# Altium PCB PCB_ACDC底板 copy copy_2023-12-22.pcbdoc
Units mm, origin at the board's own origin, x right, y up, seen from the top; angles counter-clockwise.
Board outline 87.4 x 68.92 mm, 2 copper layers (Top Layer, Bottom Layer); 41 components, 31 nets, 129 pads, 0 vias.
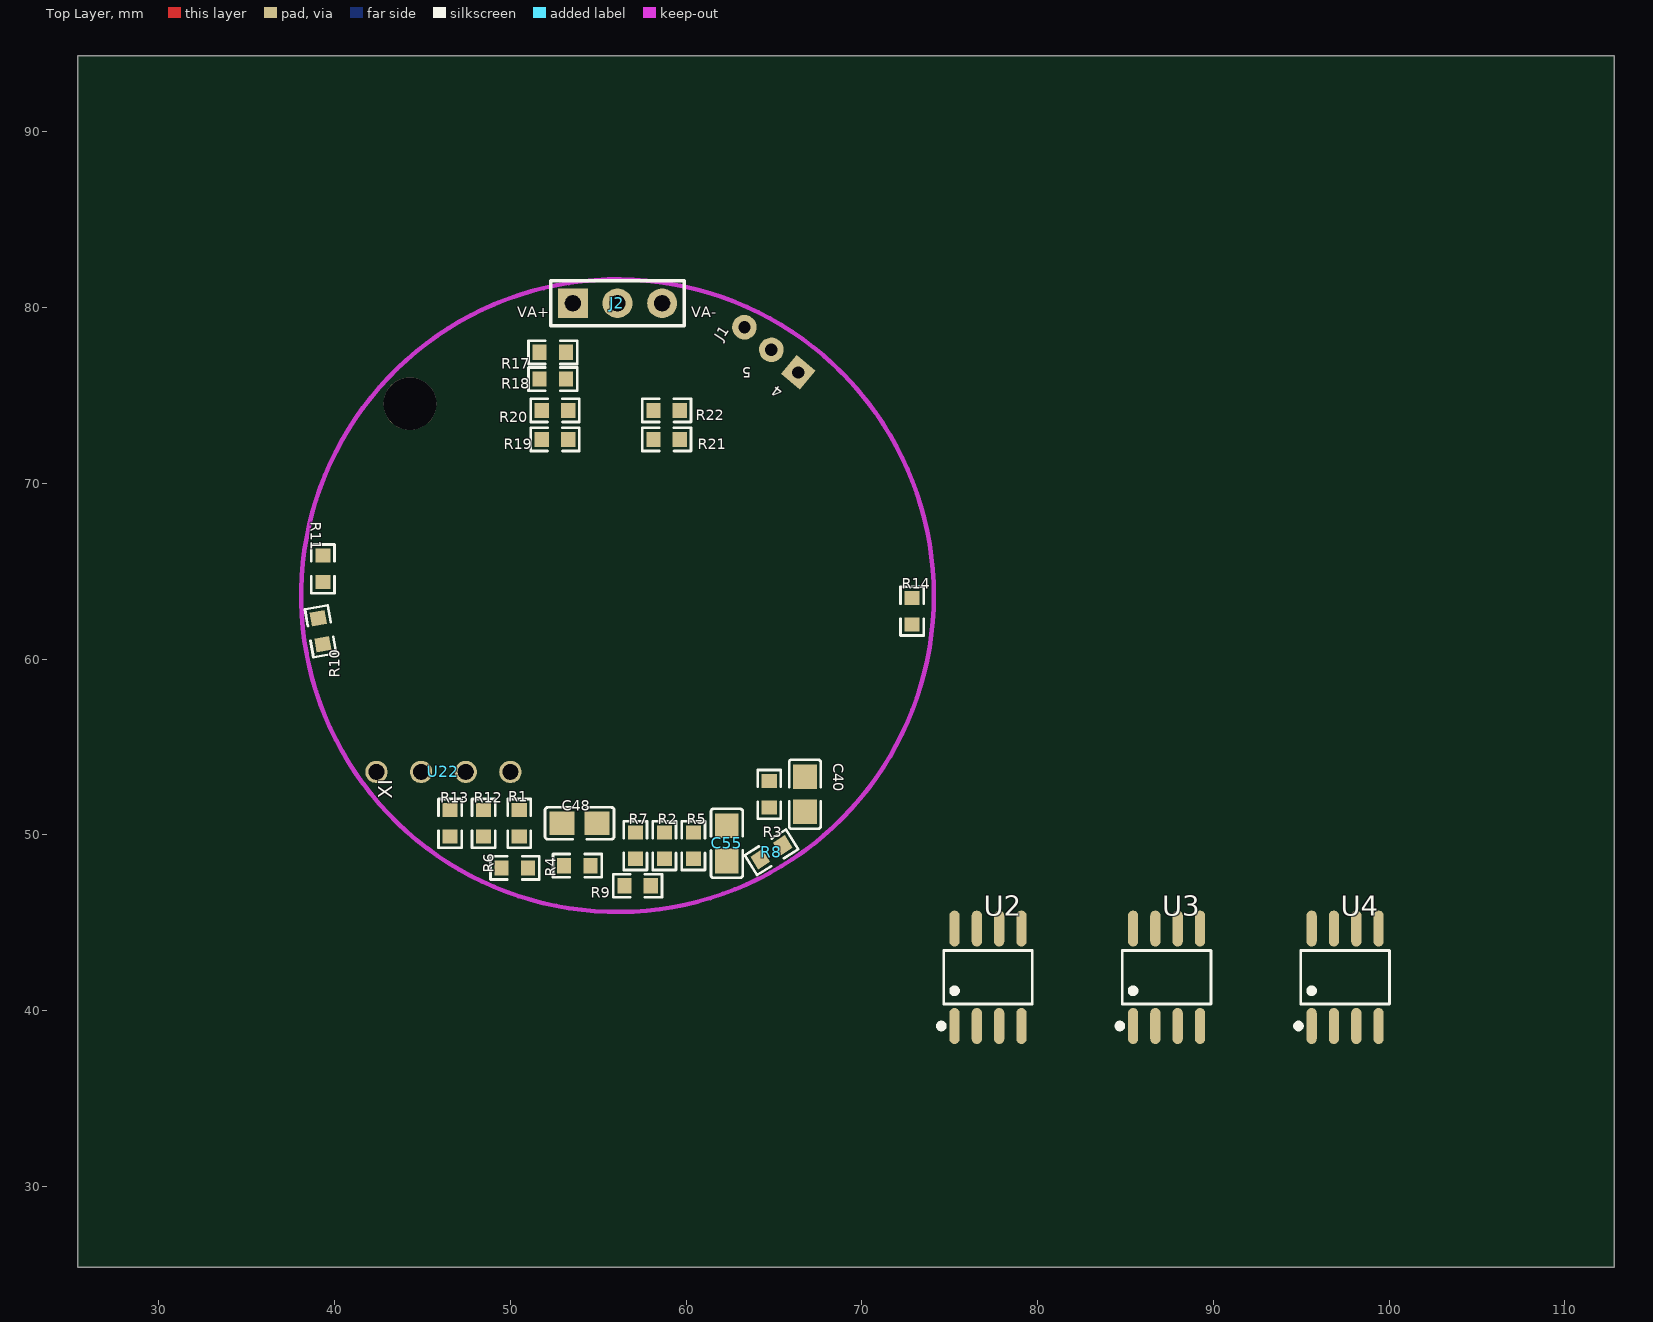
[diagram p0: Top Layer view]
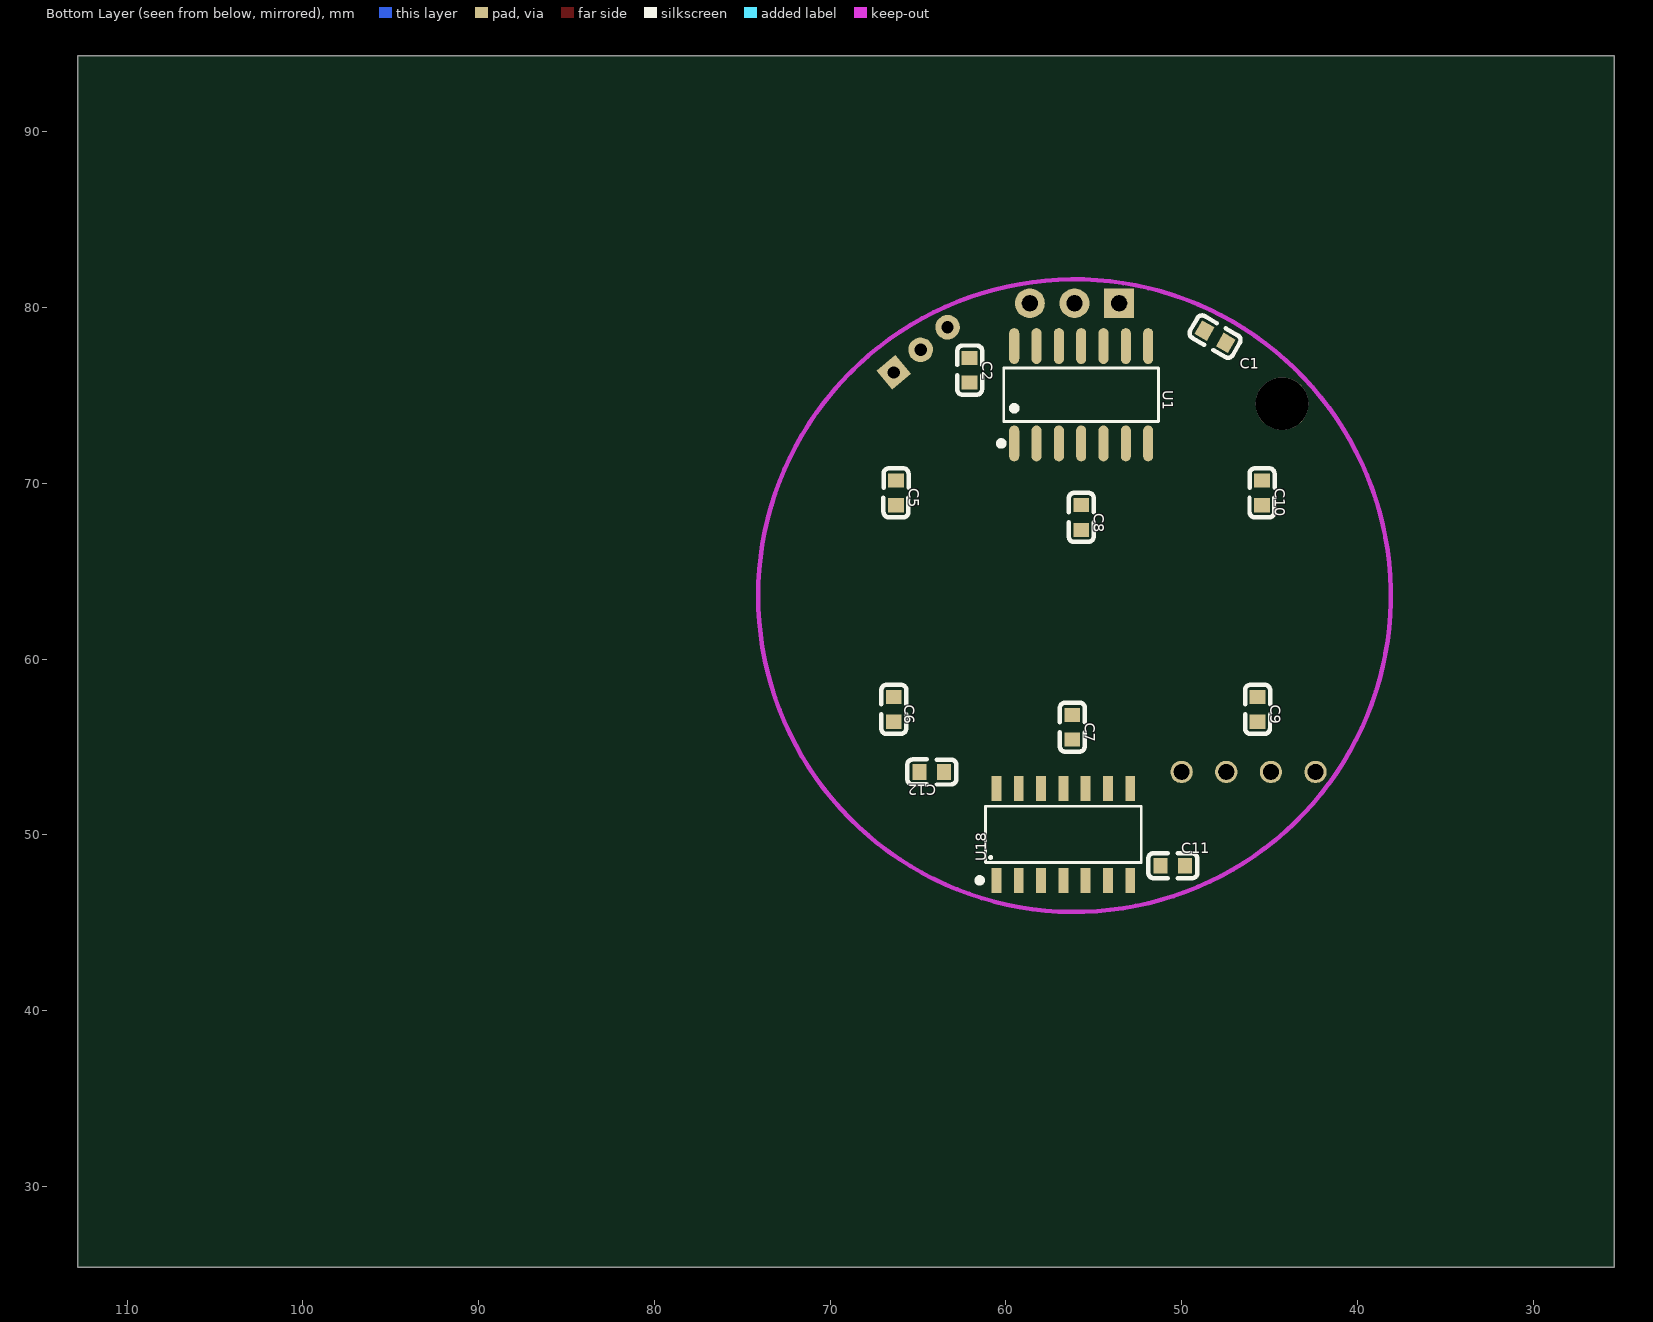
[diagram p1: Bottom Layer view, seen from below]

## Layer stack, top to bottom
Top Layer: signal copper (thickness not stored)
Dielectric: dielectric 0.32, FR-4, Dk 4.8
Bottom Layer: signal copper (thickness not stored)

## Board outline
112.804,25.4 25.4,25.4 25.4,94.319 112.804,94.319

## Components (designator, comment, footprint, x,y, rotation, side; value= is the part's Value field where it differs from the comment)
C1 "0.1u" C0603 48.099,78.344 r30 bottom
C2 "0.1u" C0603 62.069,76.439 r90 bottom
C5 "0.1u" C0603 66.26,69.454 r90 bottom
C6 "0.1u" C0603 66.387,57.135 r90 bottom
C7 "0.1u" C0603 56.227,56.119 r90 bottom
C8 "0.1u" C0603 55.719,68.057 r90 bottom
C9 "0.1u" C0603 45.686,57.135 r90 bottom
C10 "0.1u" C0603 45.432,69.454 r90 bottom
C11 "0.1u" C0603 50.512,48.245 r180 bottom
C12 "0.1u" C0603 64.228,53.579 r180 bottom
C40 "15nf" C0805 66.768,52.309 r270 top
C48 "15nf" C0805 53.941,50.658 r180 top
C55 "15nf" C0805 62.323,49.515 r90 top
J1 "排针2.0*3p" 排针2.0*3P米有 66.387,76.312 r50 top
J2 "2.54 3p 两板子之间过渡用" XH2.54-3P 56.1,80.249 r0 top
R1 "75k" R0603 50.512,50.658 r90 top
R2 "62k" R0603 58.767,49.388 r90 top
R3 "360k" R0603 64.736,52.309 r270 top
R4 "360k" R0603 53.814,48.245 r180 top
R5 "360k" R0603 60.418,49.388 r90 top
R6 "75k" R0603 50.258,48.118 r0 top
R7 "62k" R0603 57.116,49.388 r90 top
R8 "75k" R0603 64.863,49.007 r212 top
R9 "62k" R0603 57.243,47.102 r0 top
R10 "1k" R0603 39.209,61.58 r100 top
R11 "10k" R0603 39.336,65.136 r270 top
R12 "4.99k" R0603 48.48,50.658 r270 top
R13 "4.99k" R0603 46.575,50.658 r270 top
R14 "4.99k" R0603 72.864,62.723 r270 top
R17 "3k" R0603 52.417,77.455 r180 top
R18 "1k" R0603 52.417,75.931 r0 top
R19 "3k" R0603 52.544,72.502 r180 top
R20 "1k" R0603 52.544,74.153 r0 top
R21 "3k" R0603 58.894,72.502 r0 top
R22 "1k" R0603 58.894,74.153 r180 top
U1 "OPA4182IDR" SOIC-14_L8.7-W3.9-P1.27-LS6.0-BL 55.719,75.042 r0 bottom
U2 "AD633ARZ" SOIC-8_L4.9-W3.9-P1.27-LS6.0-BL 77.182,41.895 r0 top
U3 "AD633ARZ" SOIC-8_L4.9-W3.9-P1.27-LS6.0-BL 87.342,41.895 r0 top
U4 "AD633ARZ" SOIC-8_L4.9-W3.9-P1.27-LS6.0-BL 97.502,41.895 r0 top
U18 "TL084ACDT COPY" SOP-14_L8.7-W3.9-P1.27-LS6.0-BL 56.735,50.023 r0 bottom
U22 "4P 2.54排针" 2.54-4P 46.194,53.579 r0 top

## Footprints (in the part's own frame and the unit in brackets; to place one, negate y for a bottom-side part, rotate by r counter-clockwise, add the part's x,y. Pads: shape width x height; smd on the part's side, far side on the other; paste and mask are expansions set on the pad)
2.54-4P [mil]
  round 50 hole 35 slot 35.2 at 0 deg paste+0 mask+2: 1(-150,0) 2(-50,0) 3(50,0) 4(150,0)
C0603 [mm]
  rect 0.8x0.9 smd paste+0 mask+0.051: 1(0.7,0) 2(-0.7,0)
  silkscreen extent -1.39,-0.72 1.41,0.71
C0805 [mm]
  rect 1.41x1.35 smd paste-100 mask+0.051: 1(-1,0) 2(1,0)
  silkscreen extent -1.96,-0.9 1.96,0.9
R0603 [mm]
  rect 0.806x0.864 smd paste-100 mask+0.051: 1(-0.753,0) 2(0.753,0)
  silkscreen extent -1.39,-0.66 1.39,0.66
SOIC-8_L4.9-W3.9-P1.27-LS6.0-BL [mm]
  oval 0.588x2.045 smd paste+0 mask+0.051: 1(-1.905,-2.773) 2(-0.635,-2.773) 3(0.635,-2.773) 4(1.905,-2.773) 5(1.905,2.773) 6(0.635,2.773) 7(-0.635,2.773) 8(-1.905,2.773)
  silkscreen extent -2.8,-2.92 2.53,1.52
SOIC-14_L8.7-W3.9-P1.27-LS6.0-BL [mm]
  oval 0.574x2.038 smd paste+0 mask+0.051: 1(3.81,2.769) 2(2.54,2.769) 3(1.27,2.769) 4(0,2.769) 5(-1.27,2.769) 6(-2.54,2.769) 7(-3.81,2.769) 8(-3.81,-2.769) 9(-2.54,-2.769) 10(-1.27,-2.769) 11(0,-2.769) 12(1.27,-2.769) 13(2.54,-2.769) 14(3.81,-2.769)
  silkscreen extent -4.4,-1.52 4.7,2.92
SOP-14_L8.7-W3.9-P1.27-LS6.0-BL [mm]
  rect 0.56x1.43 smd paste+0 mask+0.051: 1(3.81,2.615) 2(2.54,2.615) 3(1.27,2.615) 4(0,2.615) 5(-1.27,2.615) 6(-2.54,2.615) 7(-3.81,2.615) 8(-3.81,-2.615) 9(-2.54,-2.615) 10(-1.27,-2.615) 11(0,-2.615) 12(1.27,-2.615) 13(2.54,-2.615) 14(3.81,-2.615)
  silkscreen extent -4.43,-1.6 4.86,2.71
XH2.54-3P [mm]
  rect 1.7x1.7 hole 0.9 slot 0.905 at 0 deg paste+0 mask+0.051: 1(-2.54,0)
  round 1.7 hole 0.9 slot 0.905 at 0 deg paste+0 mask+0.051: 2(0,0) 3(2.54,0)
  silkscreen extent -3.81,-1.27 3.81,1.27
排针2.0*3P米有 [mm]
  rect 1.4x1.4 hole 0.7 paste+0 mask+0.051: 1(0,0)
  round 1.4 hole 0.7 paste+0 mask+0.051: 2(0,2) 3(0,4)

## Free pads (board coordinates)
  round 3 hole 3 unplated paste+0: ""(44.289,74.534)

## Nets (pads, with @x,y where several pads share a name; then routed paths per layer and width w, separated by ;. In a path a pad name is that pad's centre, name@x,y a point inside that pad or via, vN(x,y) a via of type N, cw(c..) or ccw(c..) an arc to the next point about the centre after c; other vN are vias at no path point)
1_8: R10.1 U22.4
C40_1: C40.1 R1.2 R3.1 U18.13
C48_1: C48.1 R4.1 R6.2 U18.9
C55_1: C55.1 R5.1 R8.2 U18.2
GND: C1.2 C2.2 C5.2 C6.1 C7.1 C8.2 C9.1 C10.2 C11.1 C12.1 J2.2 R2.1 R7.1 R9.1 R11.1 R18.1 R20.1 R22.1 U2.2 U2.8 U3.2 U3.8 U4.2 U4.8 U18.5
J2_4: C55.2 R5.2 U1.3 U18.1
J2_5: C40.2 R3.2 U1.5 U18.14
J2_11: C48.2 R4.2 U1.10 U18.8
R1_1: R1.1 R12.2
R6_1: R6.1 R13.2
R8_1: R8.1 R14.2
R10_2: R10.2 R11.2 U2.1 U3.1 U4.1
R12_1: R12.1 U2.4 U2.5
R13_1: R13.1 U3.4 U3.5
R14_1: R14.1 U4.4 U4.5
S$5650: 
U1_2: R21.1 R22.2 U1.2
U1_6: R19.1 R20.2 U1.6
U1_9: R17.1 R18.2 U1.9
U18_3: R9.2 U18.3
U18_6: U18.6 U18.7
U18_10: R7.2 U18.10
U18_12: R2.2 U18.12
VA+: C1.1 C5.1 C8.1 C10.1 C11.2 J2.1 U1.4 U2.6 U3.6 U4.6 U18.4
VA-: C2.1 C6.2 C7.2 C9.2 C12.2 J2.3 U1.11 U2.3 U3.3 U4.3 U18.11
X: U2.7 U22.1
XOUT: J1.1 R21.2 U1.1
Y: U3.7 U22.2
YOUT: J1.2 R19.2 U1.7
Z: U4.7 U22.3
ZOUT: J1.3 R17.2 U1.8
pads on no net: U1.12 U1.13 U1.14

## Keep-outs
Keep-Out Layer:
  circle w0.254 net S$5650: c56.1,63.612 r18

## Silkscreen, mask and mechanical layers (free items; w line width, h text height)
Top Overlay:
  text "VA+" at 50.385,79.441 h0.6
  text "VA-" at 60.291,79.441 h0.6
  text "5" at 63.72,76.612 h0.6 r180
  text "4" at 65.547,75.285 h0.6 r144
  text "XI" at 43.292,52.055 h0.8 r90